# Altium PCB PCB2.PcbDoc
Units mm, origin at the board's own origin, x right, y up, seen from the top; angles counter-clockwise.
Board outline 100 x 50 mm, 2 copper layers (Top Layer, Bottom Layer); 20 components, 13 nets, 59 pads, 2 vias.
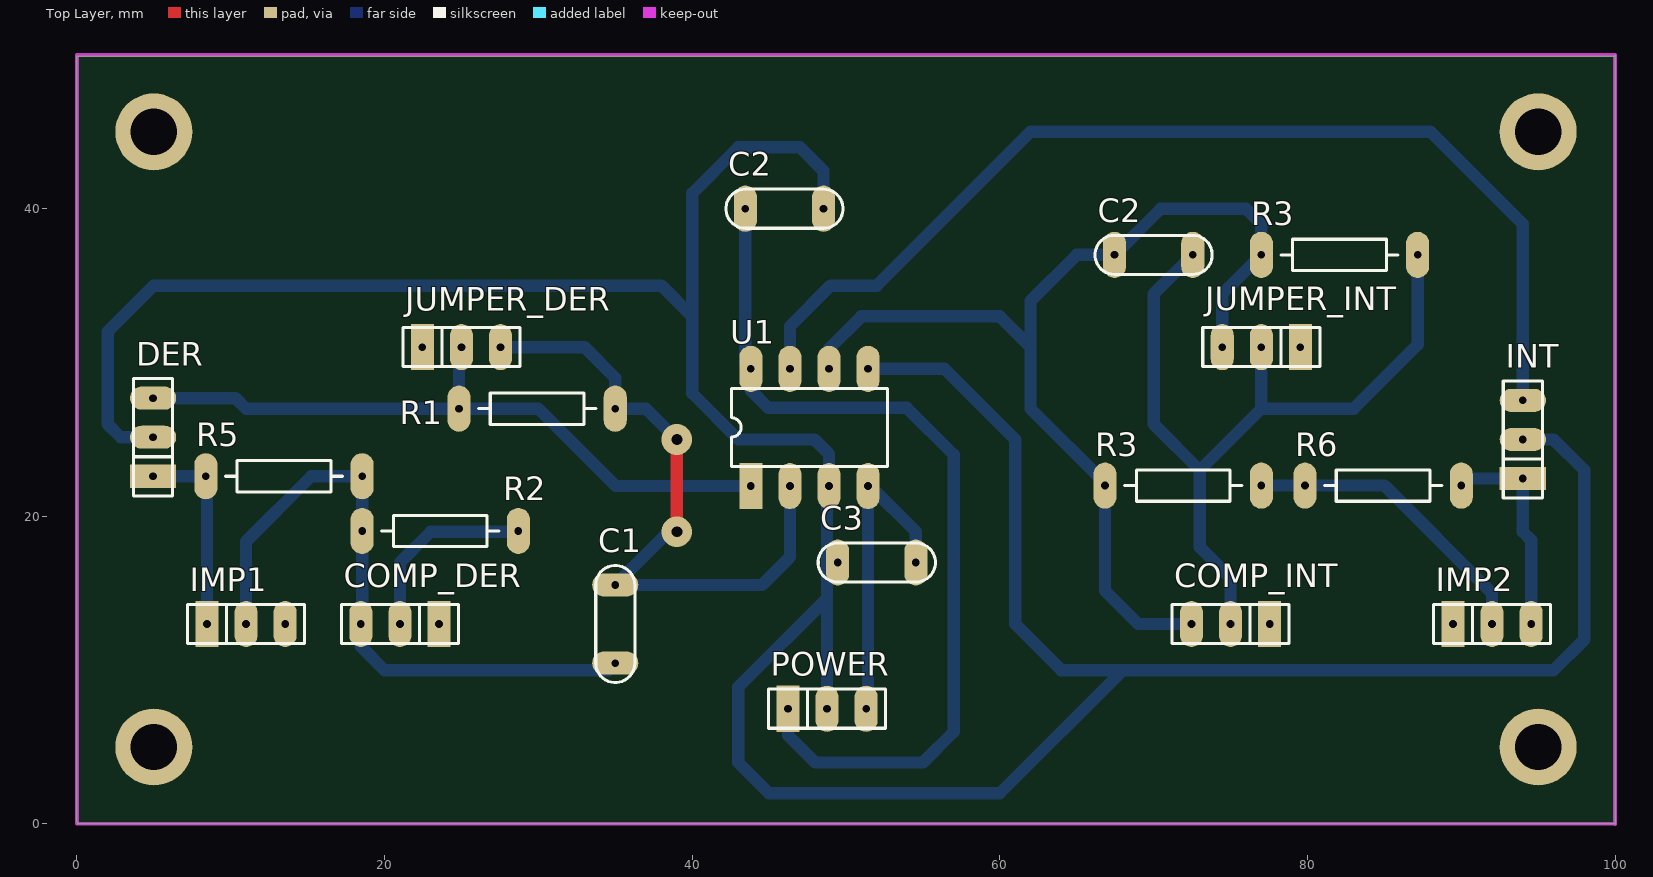
[diagram p0: Top Layer view]
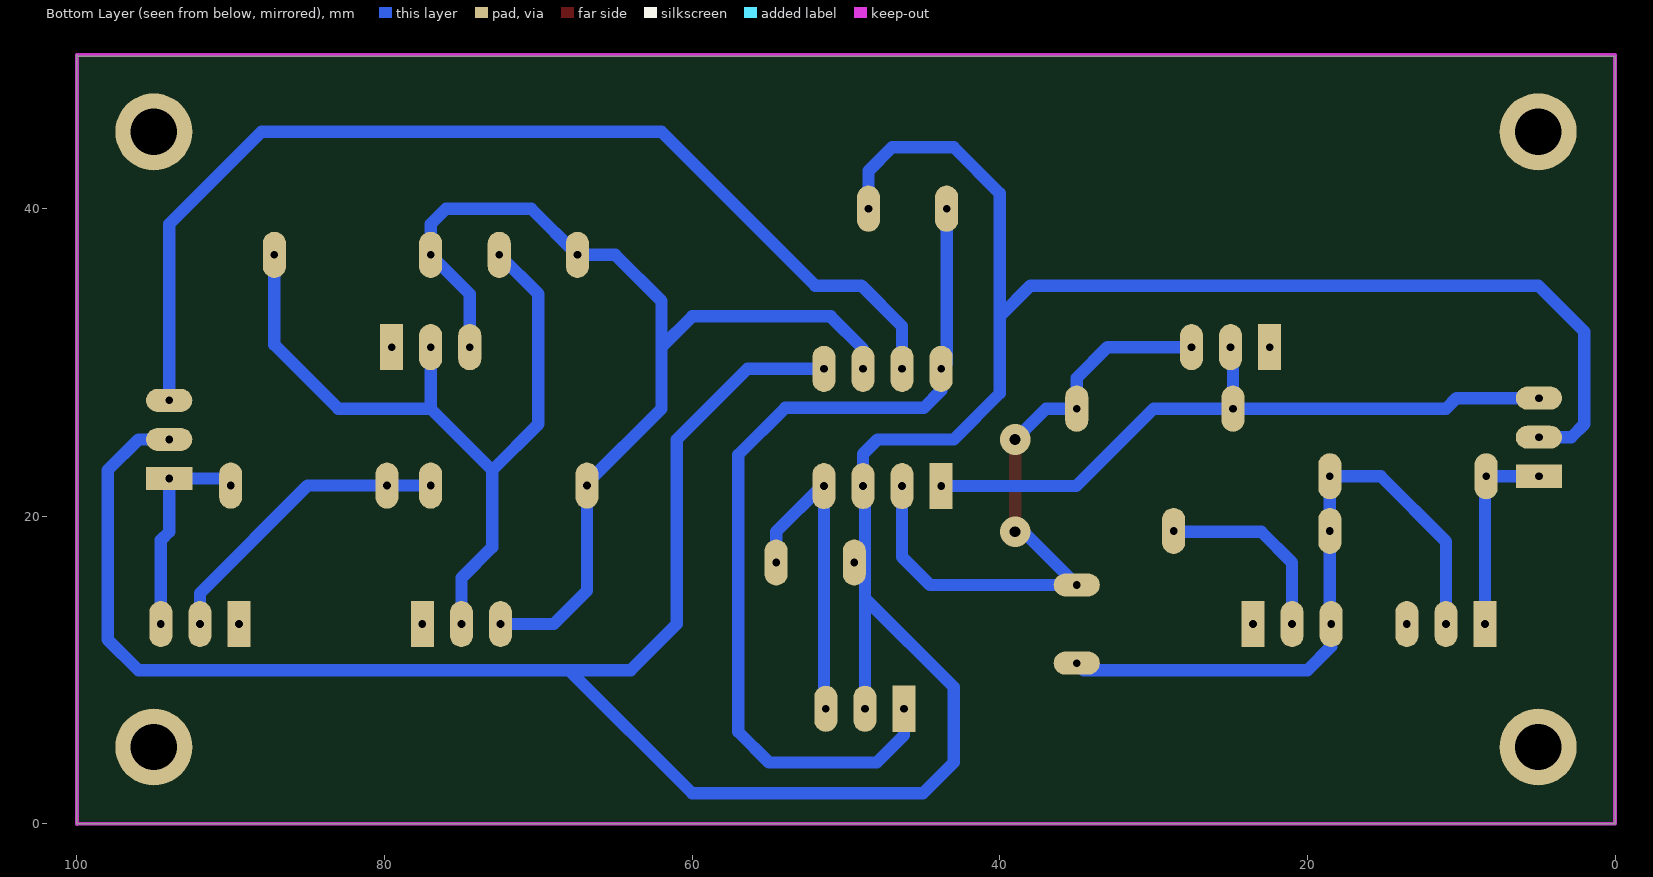
[diagram p1: Bottom Layer view, seen from below]
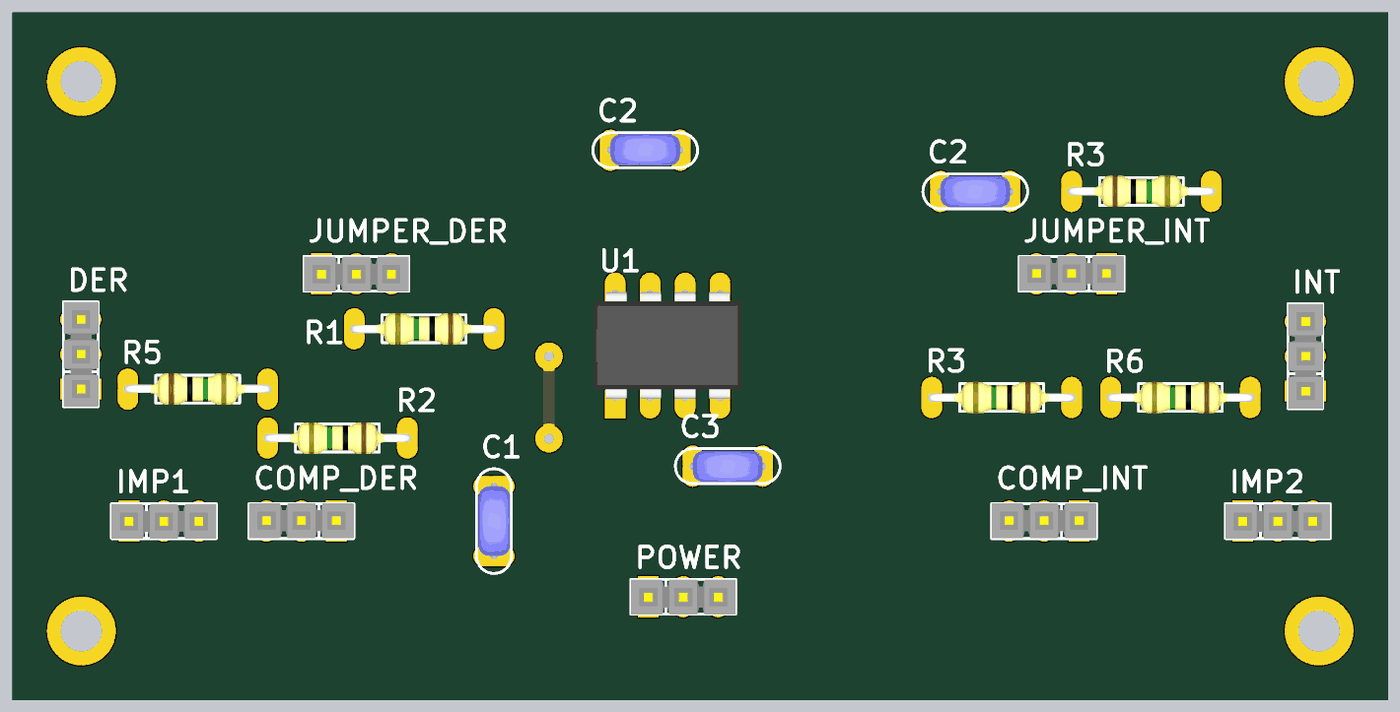
[diagram p2: 3D render of the assembled board from above, using the file's embedded part models]

## Layer stack, top to bottom
Top Solder: solder mask 0.0102, Solder Resist, Dk 3.5
Top Layer: signal copper 0.0356
Dielectric 1: dielectric 0.32, FR-4, Dk 4.8
Bottom Layer: signal copper 0.0356
Bottom Solder: solder mask 0.0102, Solder Resist, Dk 3.5

## Board outline
0,0 100,0 100,50 99.911,49.911 0,49.911 0,0.127 0.127,0

## Design rules (kind name [scope] priority, off if disabled: settings)
Clearance [All] p1: gap=0.254
PolygonConnect [All] p1: connectstyle=Relief reliefconductorwidth=0.254 reliefentries=4 polygonreliefangle="90 Angle" airgapwidth=0.254
RoutingVias [All] p1: holewidth=0.711 width=1.27 viastyle="Through Hole" minholewidth=0.711 minwidth=1.27 maxholewidth=0.711 maxwidth=1.27
SolderMaskExpansion [All] p1: expansion=0.102
Width [All] p1: maxlimit=0.8 minlimit=0.8 preferedwidth=0.8
30 further rules are at their usual default settings.

## Classes and differential pairs
component class sheet: C1 C2 C3 COMP_DER COMP_INT DER IMP1 IMP2 INT JUMPER_DER JUMPER_INT POWER R1 R2 R3 R5 R6 U1

## Components (designator, comment, footprint, x,y, rotation, side; value= is the part's Value field where it differs from the comment)
C1 "CAP" CAP200 35,13 r90 top
C2 "CAP" CAP200 70,37 r0 top
C2 "CAP" CAP200 46,40 r180 top
C3 "CAP" CAP200 52,17 r0 top
COMP_DER "CON2" SIP3 21,13 r180 top
COMP_INT "J7" SIP3 75,13 r180 top
DER "CON3" SIP3 4.953,25.146 r90 top
IMP1 "CON2" SIP3 11,13 r0 top
IMP2 "CON2" SIP3 92,13 r0 top
INT "CON2" SIP3 94,25 r90 top
JUMPER_DER "J8" SIP3 25,31 r0 top
JUMPER_INT "J6" SIP3 77,31 r180 top
POWER "CON3" SIP3 48.768,7.493 r0 top
R1 "RES" RES400 35,27 r180 top
R2 "RES" RES400 28.702,19.05 r180 top
R3 "RES" RES400 77,37 r0 top
R3 "RES" RES400 77,22 r180 top
R5 "RES" RES400 8.382,22.606 r0 top
R6 "RES" RES400 90,22 r180 top
U1 "LM833" DIP8 43.815,21.971 r90 top

## Footprints (in the part's own frame and the unit in brackets; to place one, negate y for a bottom-side part, rotate by r counter-clockwise, add the part's x,y. Pads: shape width x height; smd on the part's side, far side on the other; paste and mask are expansions set on the pad)
CAP200 [mm]
  oval 1.5x3 hole 0.5: 1(-2.54,0) 2(2.54,0)
  silkscreen extent -3.81,-1.27 3.81,1.27, body extent -2.79,-1.17 2.79,1.12, height 6.24
DIP8 [mm]
  rect 3x1.5 hole 0.5: 1(0,0)
  oval 3x1.5 hole 0.5: 2(0,-2.54) 3(0,-5.08) 4(0,-7.62) 5(7.62,-7.62) 6(7.62,-5.08) 7(7.62,-2.54) 8(7.62,0)
  silkscreen extent 1.27,-8.89 6.35,1.27, body extent -0.06,-9.21 7.7,1.59, height 4.5
RES400 [mm]
  oval 1.5x3 hole 0.5: 1(0,0) 2(10.16,0)
  silkscreen extent 1.27,-1.02 8.89,1.02, body extent -0.3,-1.14 10.46,1.17, height 2.43
SIP3 [mm]
  rect 1.5x3 hole 0.5: 1(-2.54,0)
  oval 1.5x3 hole 0.5: 2(0,0) 3(2.54,0)
  silkscreen extent -3.81,-1.27 3.81,1.27, body extent -3.81,-1.3 3.81,1.24, height 8.38

## Part data
COMP_DER COMP_INT IMP1 IMP2 INT JUMPER_DER JUMPER_INT: library part CON3
U1: "Dual Audio Operational Amplifier"

## Free pads (board coordinates)
  round 5 hole 3: 0(5,45) 1(5,5) 2(95,45) 3(95,5)

## Via types
v1: diameter 2, hole 0.711, Top Layer to Bottom Layer, 2 vias

## Nets (pads, with @x,y where several pads share a name; then routed paths per layer and width w, separated by ;. In a path a pad name is that pad's centre, name@x,y a point inside that pad or via, vN(x,y) a via of type N, cw(c..) or ccw(c..) an arc to the next point about the centre after c; other vN are vias at no path point)
+VCC: C2.2@43.46,40 POWER.1 U1.8 | length 58.9
  Bottom Layer w0.8: C2.2@43.46,40 43.46,29.946 U1.8 43.815,28.185 44.946,27.054 53.946,27.054 57,24 57,6 55,4 48,4 46.228,5.772 POWER.1
-VCC: C3.2 POWER.3 U1.4 | length 20.9
  Bottom Layer w0.8: POWER.3 51.435,7.62 U1.4 51.569,21.971 54.54,19 C3.2
GND: C2.1@48.54,40 C3.1 DER.2 INT.2 POWER.2 U1.3 U1.5 | length 223.7
  Bottom Layer w0.8: DER.2 2.854,25.146 2,26 2,32 5,35 38,35 40,33 ; C2.1@48.54,40 48.54,42.46 47,44 43,44 40,41 40,33 ; POWER.2 48.768,14.668 ; C3.1 C3.1@48.768,17 ; U1.5 56.409,29.591 61,25 61,13 64,10 68,10 ; INT.2 96,25 98,23 98,12 96,10 68,10 ; 40,33 40,28 43,25 47.946,25 48.895,24.051 U1.3 48.768,21.844 C3.1@48.768,17 ; 48.768,14.668 C3.1@48.768,17 ; 48.768,14.668 43,8.901 43,4 45,2 60,2 68,10
INPUT: DER.1 IMP1.1 R5.1 | length 13
  Bottom Layer w0.8: DER.1 R5.1 ; IMP1.1 R5.1@8.46,22.528
INPUT2: IMP2.3 INT.1 R6.1 | length 13.9
  Bottom Layer w0.8: R6.1 90.46,22.46 INT.1 94,19 94.54,18.46 IMP2.3
NetC1_1: C1.1 COMP_DER.3 IMP1.2 R2.2 R5.2 | length 43.1
  Bottom Layer w0.8: IMP1.2 11,18.366 15.24,22.606 R5.2 R2.2 18.542,13.082 COMP_DER.3 18.46,11.54 20,10 34.54,10 C1.1
NetC1_2: C1.2 JUMPER_DER.3 R1.1 U1.2 | length 43.3
  Top Layer w0.8: v1(39,19) v1(39,25)
  Bottom Layer w0.8: JUMPER_DER.3 33,31 35,29 R1.1 37,27 v1(39,25) ; v1(39,19) 38.46,19 C1.2 44.54,15.54 46.355,17.355 U1.2
NetC2_1: C2.1@67.46,37 COMP_INT.3 JUMPER_INT.3 R3.1@77,37 R3.2@66.84,22 U1.6 | length 70.4
  Bottom Layer w0.8: U1.6 48.895,30.895 51,33 60,33 62,31 ; COMP_INT.3 69,13 66.84,15.16 66.84,22 66.84,22.16 62,27 62,31 ; JUMPER_INT.3 74.46,34.46 77,37 77,39 76,40 70.46,40 67.46,37 65,37 62,34 62,31
NetC2_2: C2.2@72.54,37 COMP_INT.2 JUMPER_INT.2 R3.2@87.16,37 | length 54.5
  Bottom Layer w0.8: C2.2@72.54,37 70,34.46 70,26 73,23 ; COMP_INT.2 75,16 73,18 73,23 ; JUMPER_INT.2 77,27 ; R3.2@87.16,37 87.16,31.16 83,27 77,27 ; 73,23 77,27
NetCOMP_DER_2: COMP_DER.2 R2.1 | length 12.5
  Bottom Layer w0.8: COMP_DER.2 21,17 23,19 R2.1@28.702,19
NetIMP2_2: IMP2.2 R3.1@77,22 R6.2 | length 19.9
  Bottom Layer w0.8: R3.1@77,22 R6.2 85,22 92,15 IMP2.2
OUTPUT: DER.3 JUMPER_DER.2 R1.2 U1.1 | length 45.3
  Bottom Layer w0.8: DER.3 10.314,27.686 11,27 R1.2 ; JUMPER_DER.2 24.84,30.84 R1.2 ; U1.1 35.029,21.971 30,27 R1.2
OUTPUT2: INT.3 U1.7 | length 69.6
  Bottom Layer w0.8: U1.7 46.355,32.355 49,35 52,35 62,45 88,45 94,39 INT.3
pads on no net: COMP_DER.1 COMP_INT.1 IMP1.3 IMP2.1 JUMPER_DER.1 JUMPER_INT.1

## Keep-outs
Keep-Out Layer:
  lines w0.254: 0,0.018 99.982,0.018 ; 0,0.127 0,50 100,50 100,0